# Altium PCB WorldClock.PcbDoc (part 11 of 13)
Units mil, origin at the board's own origin, x right, y up, seen from the top; angles counter-clockwise.
Board outline 3700 x 3850 mil, 2 copper layers (Top Layer, Bottom Layer); 227 components, 134 nets, 1324 pads, 248 vias.
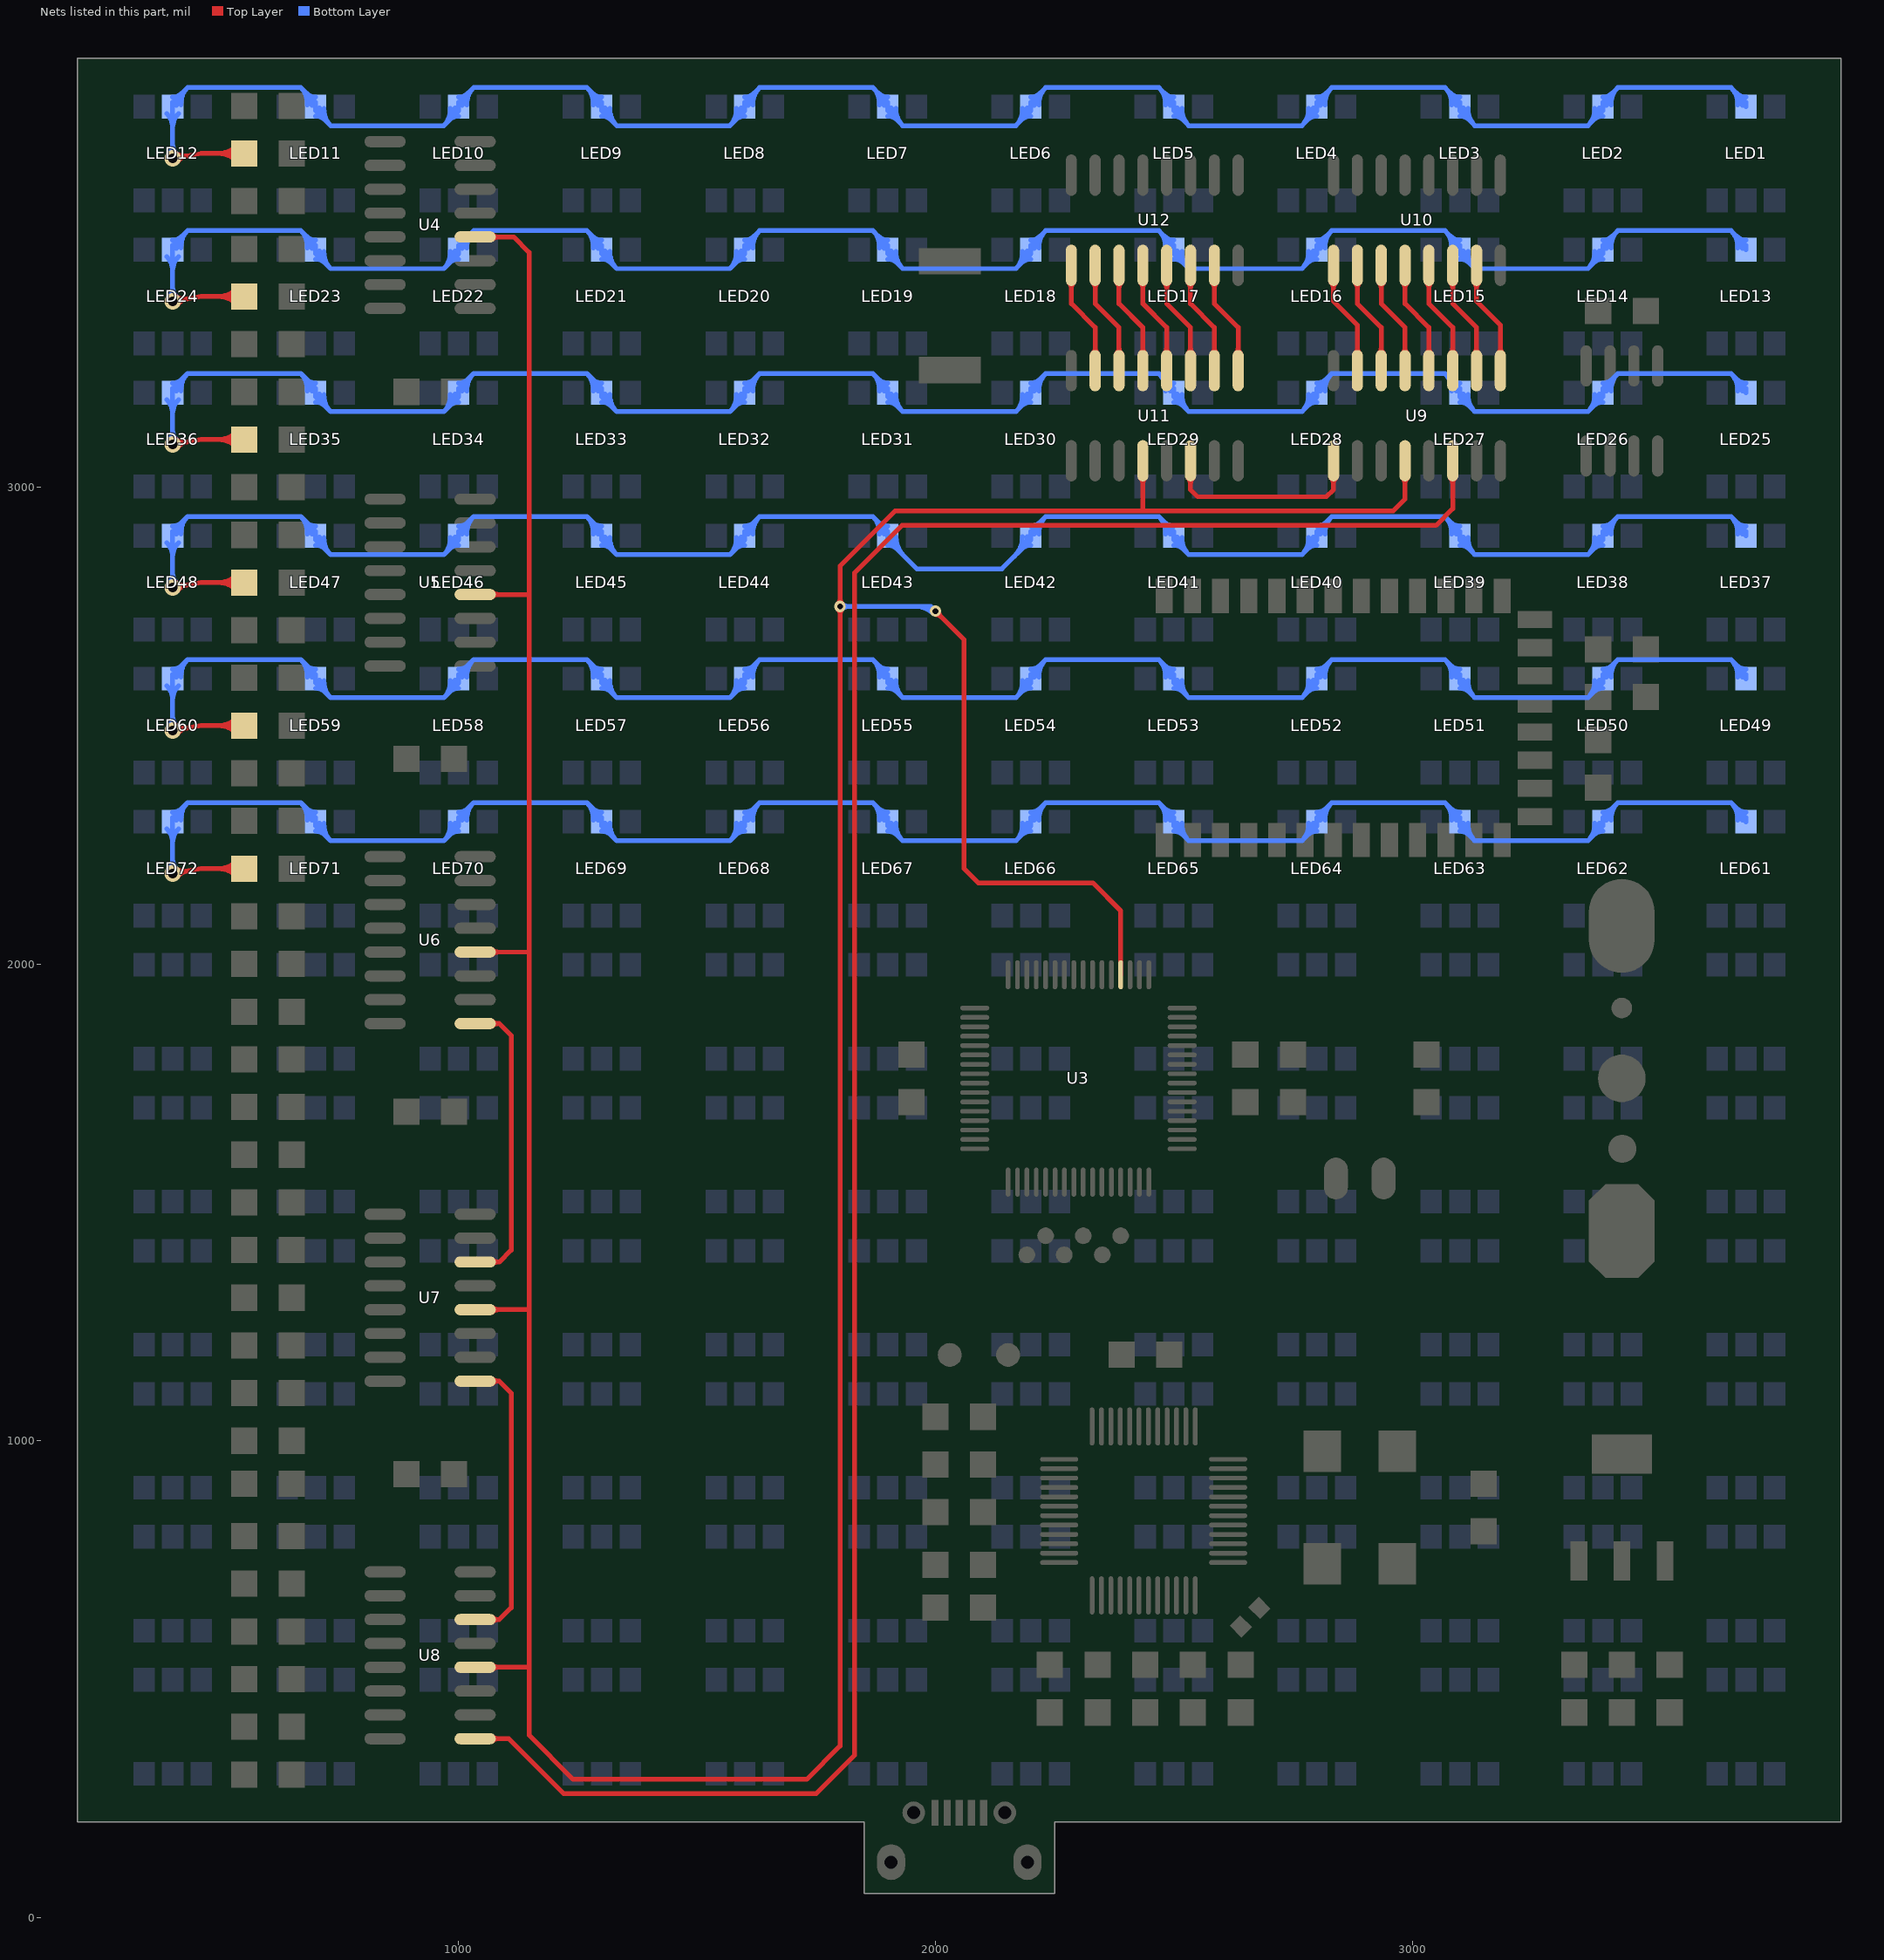
[diagram p11: the nets of this part, all layers, seen from the top]

## Via types
v1: diameter 35, hole 20, Top Layer to Bottom Layer, tented both sides, 213 vias
v2: diameter 24, hole 12, Top Layer to Bottom Layer, tented both sides, 35 vias

## Nets (pads, with @x,y where several pads share a name; then routed paths per layer and width w, separated by ;. In a path a pad name is that pad's centre, name@x,y a point inside that pad or via, vN(x,y) a via of type N, cw(c..) or ccw(c..) an arc to the next point about the centre after c; other vN are vias at no path point) (continued)
NetU6_9: U6.9 U7.14 | length 673.4
  Top Layer w10: U7.14@1034.49,1375 1085,1375 1110,1400 1110,1850 1085,1875 U6.9@1034.49,1875 ; U7.14@1070.8,1370.18 cw(c1082.43,1358.56) 1082.43,1375 cw(c1082.43,1391.44) U7.14@1070.8,1379.82 ; U6.9@1070.8,1870.18 cw(c1082.43,1858.56) 1082.43,1875 cw(c1082.43,1891.44) U6.9@1070.8,1879.82
NetU7_9: U7.9 U8.14 | length 673.4
  Top Layer w10: U8.14@1034.49,625 1085,625 1110,650 1110,1100 1085,1125 U7.9@1034.49,1125 ; U8.14@1070.8,620.18 cw(c1082.43,608.56) 1082.43,625 cw(c1082.43,641.44) U8.14@1070.8,629.82 ; U7.9@1070.8,1120.18 cw(c1082.43,1108.56) 1082.43,1125 cw(c1082.43,1141.44) U7.9@1070.8,1129.82
NetU8_9: U8.9 U9.14 | length 4819.4
  Top Layer w10: U8.9@1034.49,375 1105,375 1220,260 1750,260 1830,340 1830,2820 1930,2920 3050,2920 3085,2955 U9.14@3085,3055.51 ; U8.9@1070.8,370.18 cw(c1082.43,358.56) 1082.43,375 cw(c1082.43,391.44) U8.9@1070.8,379.82 ; U9.14@3080.18,3019.2 cw(c3068.56,3007.57) 3085,3007.57 cw(c3101.44,3007.57) U9.14@3089.82,3019.2
NetU9_1: U9.1 U10.7 | length 283.4
  Top Layer w10: U10.7@3130.18,3429.2 cw(c3118.56,3417.57) 3135,3417.57 cw(c3151.44,3417.57) U10.7@3139.82,3429.2 ; U10.7@3135,3465.51 3135,3390 3185,3340 U9.1@3185,3254.49 ; U9.1@3180.18,3280.8 ccw(c3168.56,3292.43) 3185,3292.43 ccw(c3201.44,3292.43) U9.1@3189.82,3280.8
NetU9_2: U9.2 U10.6 | length 283.4
  Top Layer w10: U10.6@3080.18,3429.2 cw(c3068.56,3417.57) 3085,3417.57 cw(c3101.44,3417.57) U10.6@3089.82,3429.2 ; U10.6@3085,3465.51 3085,3385 3135,3335 U9.2@3135,3254.49 ; U9.2@3130.18,3280.8 ccw(c3118.56,3292.43) 3135,3292.43 ccw(c3151.44,3292.43) U9.2@3139.82,3280.8
NetU9_3: U9.3 U10.5 | length 283.4
  Top Layer w10: U10.5@3030.18,3429.2 cw(c3018.56,3417.57) 3035,3417.57 cw(c3051.44,3417.57) U10.5@3039.82,3429.2 ; U10.5@3035,3465.51 3035,3385 3085,3335 U9.3@3085,3254.49 ; U9.3@3080.18,3280.8 ccw(c3068.56,3292.43) 3085,3292.43 ccw(c3101.44,3292.43) U9.3@3089.82,3280.8
NetU9_4: U9.4 U10.4 | length 283.4
  Top Layer w10: U10.4@2980.18,3429.2 cw(c2968.56,3417.57) 2985,3417.57 cw(c3001.44,3417.57) U10.4@2989.82,3429.2 ; U10.4@2985,3465.51 2985,3385 3035,3335 U9.4@3035,3254.49 ; U9.4@3030.18,3280.8 ccw(c3018.56,3292.43) 3035,3292.43 ccw(c3051.44,3292.43) U9.4@3039.82,3280.8
NetU9_5: U9.5 U10.3 | length 283.4
  Top Layer w10: U10.3@2930.18,3429.2 cw(c2918.56,3417.57) 2935,3417.57 cw(c2951.44,3417.57) U10.3@2939.82,3429.2 ; U10.3@2935,3465.51 2935,3385 2985,3335 U9.5@2985,3254.49 ; U9.5@2980.18,3280.8 ccw(c2968.56,3292.43) 2985,3292.43 ccw(c3001.44,3292.43) U9.5@2989.82,3280.8
NetU9_6: U9.6 U10.2 | length 283.4
  Top Layer w10: U10.2@2880.18,3429.2 cw(c2868.56,3417.57) 2885,3417.57 cw(c2901.44,3417.57) U10.2@2889.82,3429.2 ; U10.2@2885,3465.51 2885,3385 2935,3335 U9.6@2935,3254.49 ; U9.6@2930.18,3280.8 ccw(c2918.56,3292.43) 2935,3292.43 ccw(c2951.44,3292.43) U9.6@2939.82,3280.8
NetU9_7: U9.7 U10.1 | length 283.4
  Top Layer w10: U10.1@2830.18,3429.2 cw(c2818.56,3417.57) 2835,3417.57 cw(c2851.44,3417.57) U10.1@2839.82,3429.2 ; U10.1@2835,3465.51 2835,3390 2885,3340 U9.7@2885,3254.49 ; U9.7@2880.18,3280.8 ccw(c2868.56,3292.43) 2885,3292.43 ccw(c2901.44,3292.43) U9.7@2889.82,3280.8
NetU9_9: U9.9 U11.14 | length 495.1
  Top Layer w10: U11.14@2530.18,3019.2 cw(c2518.56,3007.57) 2535,3007.57 cw(c2551.44,3007.57) U11.14@2539.82,3019.2 ; U11.14@2535,3065.51 2535,2995 2550,2980 2820,2980 2835,2995 U9.9@2835,3055.51 ; U9.9@2830.18,3019.2 cw(c2818.56,3007.57) 2835,3007.57 cw(c2851.44,3007.57) U9.9@2839.82,3019.2
NetU11_1: U11.1 U12.7 | length 283.4
  Top Layer w10: U12.7@2580.18,3429.2 cw(c2568.56,3417.57) 2585,3417.57 cw(c2601.44,3417.57) U12.7@2589.82,3429.2 ; U12.7@2585,3465.51 2585,3385 2635,3335 U11.1@2635,3254.49 ; U11.1@2630.18,3280.8 ccw(c2618.56,3292.43) 2635,3292.43 ccw(c2651.44,3292.43) U11.1@2639.82,3280.8
NetU11_2: U11.2 U12.6 | length 283.4
  Top Layer w10: U12.6@2530.18,3429.2 cw(c2518.56,3417.57) 2535,3417.57 cw(c2551.44,3417.57) U12.6@2539.82,3429.2 ; U12.6@2535,3465.51 2535,3385 2585,3335 U11.2@2585,3254.49 ; U11.2@2580.18,3280.8 ccw(c2568.56,3292.43) 2585,3292.43 ccw(c2601.44,3292.43) U11.2@2589.82,3280.8
NetU11_3: U11.3 U12.5 | length 283.4
  Top Layer w10: U12.5@2480.18,3429.2 cw(c2468.56,3417.57) 2485,3417.57 cw(c2501.44,3417.57) U12.5@2489.82,3429.2 ; U12.5@2485,3465.51 2485,3385 2535,3335 U11.3@2535,3254.49 ; U11.3@2530.18,3280.8 ccw(c2518.56,3292.43) 2535,3292.43 ccw(c2551.44,3292.43) U11.3@2539.82,3280.8
NetU11_4: U11.4 U12.4 | length 283.4
  Top Layer w10: U12.4@2430.18,3429.2 cw(c2418.56,3417.57) 2435,3417.57 cw(c2451.44,3417.57) U12.4@2439.82,3429.2 ; U12.4@2435,3465.51 2435,3385 2485,3335 U11.4@2485,3254.49 ; U11.4@2480.18,3280.8 ccw(c2468.56,3292.43) 2485,3292.43 ccw(c2501.44,3292.43) U11.4@2489.82,3280.8
NetU11_5: U11.5 U12.3 | length 283.4
  Top Layer w10: U12.3@2380.18,3429.2 cw(c2368.56,3417.57) 2385,3417.57 cw(c2401.44,3417.57) U12.3@2389.82,3429.2 ; U12.3@2385,3465.51 2385,3385 2435,3335 U11.5@2435,3254.49 ; U11.5@2430.18,3280.8 ccw(c2418.56,3292.43) 2435,3292.43 ccw(c2451.44,3292.43) U11.5@2439.82,3280.8
NetU11_6: U11.6 U12.2 | length 283.4
  Top Layer w10: U12.2@2330.18,3429.2 cw(c2318.56,3417.57) 2335,3417.57 cw(c2351.44,3417.57) U12.2@2339.82,3429.2 ; U12.2@2335,3465.51 2335,3385 2385,3335 U11.6@2385,3254.49 ; U11.6@2380.18,3280.8 ccw(c2368.56,3292.43) 2385,3292.43 ccw(c2401.44,3292.43) U11.6@2389.82,3280.8
NetU11_7: U11.7 U12.1 | length 283.4
  Top Layer w10: U12.1@2280.18,3429.2 cw(c2268.56,3417.57) 2285,3417.57 cw(c2301.44,3417.57) U12.1@2289.82,3429.2 ; U12.1@2285,3465.51 2285,3385 2335,3335 U11.7@2335,3254.49 ; U11.7@2330.18,3280.8 ccw(c2318.56,3292.43) 2335,3292.43 ccw(c2351.44,3292.43) U11.7@2339.82,3280.8
OCK: U3.20 U4.12 U5.12 U6.12 U7.12 U8.12 U9.12 U11.12 | length 9938.7
  Top Layer w10: U8.12@1034.49,525 1147.5,525 ; U7.12@1034.49,1275 1147.5,1275 ; U6.12@1034.49,2025 1147.5,2025 ; U5.12@1034.49,2775 1147.5,2775 ; U4.12@1034.49,3525 1115,3525 1147.5,3492.5 1147.5,2775 ; U8.12@1070.8,520.18 cw(c1082.43,508.56) 1082.43,525 cw(c1082.43,541.44) U8.12@1070.8,529.82 ; U7.12@1070.8,1270.18 cw(c1082.43,1258.56) 1082.43,1275 cw(c1082.43,1291.44) U7.12@1070.8,1279.82 ; U6.12@1070.8,2020.18 cw(c1082.43,2008.56) 1082.43,2025 cw(c1082.43,2041.44) U6.12@1070.8,2029.82 ; U5.12@1070.8,2770.18 cw(c1082.43,2758.56) 1082.43,2775 cw(c1082.43,2791.44) U5.12@1070.8,2779.82 ; U4.12@1070.8,3520.18 cw(c1082.43,3508.56) 1082.43,3525 cw(c1082.43,3541.44) U4.12@1070.8,3529.82 ; v2@1795.05,2745.05 cw(c1783.1,2733.1) 1800,2733.1 cw(c1816.9,2733.1) v2@1804.95,2745.05 ; v2@1795.05,2754.95 ccw(c1783.1,2766.9) 1800,2766.9 ccw(c1816.9,2766.9) v2@1804.95,2754.95 ; v2@2000,2733 cw(c2000,2716.1) 2011.95,2728.05 cw(c2023.9,2740) v2@2007,2740 ; v2(2000,2740) 2060,2680 2060,2200 2090,2170 2330,2170 2388.58,2111.42 U3.20@2388.58,1977.52 ; U11.12@2430.18,3019.2 cw(c2418.56,3007.57) 2435,3007.57 cw(c2451.44,3007.57) U11.12@2439.82,3019.2 ; 2435,2950 U11.12@2435,3065.51 ; U9.12@2980.18,3019.2 cw(c2968.56,3007.57) 2985,3007.57 cw(c3001.44,3007.57) U9.12@2989.82,3019.2 ; U9.12@2985,3055.51 2985,2975 2960,2950 1915,2950 1800,2835 v2(1800,2750) 1800,360 1730,290 1240,290 1147.5,382.5 1147.5,525 ; 1147.5,525 1147.5,1275 ; 1147.5,1275 1147.5,2025 ; 1147.5,2025 1147.5,2775
  Bottom Layer w10: v2(1800,2750) 1990,2750 v2(2000,2740) ; v2@1804.95,2745.05 cw(c1816.9,2733.1) 1816.9,2750 cw(c1816.9,2766.9) v2@1804.95,2754.95 ; 1958.96,2750 cw(c1958.96,2698.96) v2@1995.05,2735.05 ; 1983.1,2750 cw(c1983.1,2723.1) v2@2002.12,2742.12
R1: LED1.2 LED2.2 LED3.2 LED4.2 LED5.2 LED6.2 LED7.2 LED8.2 LED9.2 LED10.2 LED11.2 LED12.2 R10.1 | length 6201.5
  Top Layer w10: v1(400,3690) 460,3700 R10.1@550,3700 ; v1@407.27,3700.17 ccw(c424.81,3724.73) 429.77,3694.96 ccw(c434.73,3665.19) v1@410.17,3682.73 ; R10.1@534.09,3684.09 ccw(c495.68,3645.68) 495.68,3700 ccw(c495.68,3754.32) R10.1@534.09,3715.91 ; R10.1@541.16,3691.16 ccw(c519.82,3669.82) 519.82,3700 ccw(c519.82,3730.18) R10.1@541.16,3708.84
  Bottom Layer w10: LED12.2@387.63,3783.55 cw(c357.75,3753.68) 400,3753.68 cw(c442.25,3753.68) LED12.2@412.37,3783.55 ; v1@391.16,3698.84 ccw(c369.82,3720.18) 400,3720.18 ccw(c430.18,3720.18) v1@408.84,3698.84 ; v1(400,3690) LED12.2@400,3798.43 400,3807.14 431.29,3838.43 668.71,3838.43 700,3807.14 LED11.2@700,3798.43 700,3789.71 731.29,3758.43 ; LED12.2@400,3818.43 ccw(c400,3845.67) 419.27,3826.41 ; LED12.2@407.49,3801.38 cw(c435.23,3803.06) LED12.2@415.58,3822.71 ; LED12.2@417.47,3801.98 cw(c464.85,3804.86) 431.28,3838.42 ; 668.72,3838.42 cw(c635.15,3804.86) LED11.2@682.53,3801.98 ; 680.73,3826.41 ccw(c700,3845.67) LED11.2@700,3818.43 ; LED11.2@684.42,3822.71 cw(c664.77,3803.06) LED11.2@692.51,3801.38 ; LED11.2@700,3778.43 cw(c700,3751.18) 719.27,3770.44 ; LED11.2@707.49,3795.47 ccw(c735.23,3793.79) LED11.2@715.58,3774.14 ; LED11.2@717.47,3794.87 ccw(c764.85,3791.99) 731.28,3758.43 ; 980.73,3770.44 cw(c1000,3751.18) LED10.2@1000,3778.43 ; LED10.2@982.53,3794.87 cw(c935.15,3791.99) 968.72,3758.43 ; LED10.2@984.42,3774.14 ccw(c964.77,3793.79) LED10.2@992.51,3795.47 ; LED10.2@1000,3818.43 ccw(c1000,3845.67) 1019.27,3826.41 ; LED10.2@1007.49,3801.38 cw(c1035.23,3803.06) LED10.2@1015.58,3822.71 ; LED10.2@1017.47,3801.98 cw(c1064.85,3804.86) 1031.28,3838.42 ; 1268.72,3838.42 cw(c1235.15,3804.86) LED9.2@1282.53,3801.98 ; 1280.73,3826.41 ccw(c1300,3845.67) LED9.2@1300,3818.43 ; LED9.2@1284.42,3822.71 cw(c1264.77,3803.06) LED9.2@1292.51,3801.38 ; LED9.2@1300,3778.43 cw(c1300,3751.18) 1319.27,3770.44 ; LED9.2@1307.49,3795.47 ccw(c1335.23,3793.79) LED9.2@1315.58,3774.14 ; LED9.2@1317.47,3794.87 ccw(c1364.85,3791.99) 1331.28,3758.43 ; 1580.73,3770.44 cw(c1600,3751.18) LED8.2@1600,3778.43 ; LED8.2@1582.53,3794.87 cw(c1535.15,3791.99) 1568.72,3758.43 ; LED8.2@1584.42,3774.14 ccw(c1564.77,3793.79) LED8.2@1592.51,3795.47 ; LED8.2@1600,3818.43 ccw(c1600,3845.67) 1619.27,3826.41 ; LED8.2@1607.49,3801.38 cw(c1635.23,3803.06) LED8.2@1615.58,3822.71 ; LED8.2@1617.47,3801.98 cw(c1664.85,3804.86) 1631.28,3838.42 ; 1868.72,3838.42 cw(c1835.15,3804.86) LED7.2@1882.53,3801.98 ; 1880.73,3826.41 ccw(c1900,3845.67) LED7.2@1900,3818.43 ; LED7.2@1884.42,3822.71 cw(c1864.77,3803.06) LED7.2@1892.51,3801.38 ; LED7.2@1900,3778.43 cw(c1900,3751.18) 1919.27,3770.44 ; LED7.2@1907.49,3795.47 ccw(c1935.23,3793.79) LED7.2@1915.58,3774.14 ; LED7.2@1917.47,3794.87 ccw(c1964.85,3791.99) 1931.28,3758.43 ; 2180.73,3770.44 cw(c2200,3751.18) LED6.2@2200,3778.43 ; LED6.2@2182.53,3794.87 cw(c2135.15,3791.99) 2168.72,3758.43 ; LED6.2@2184.42,3774.14 ccw(c2164.77,3793.79) LED6.2@2192.51,3795.47 ; LED6.2@2200,3818.43 ccw(c2200,3845.67) 2219.27,3826.41 ; LED6.2@2207.49,3801.38 cw(c2235.23,3803.06) LED6.2@2215.58,3822.71 ; LED6.2@2217.47,3801.98 cw(c2264.85,3804.86) 2231.28,3838.42 ; 2468.72,3838.42 cw(c2435.15,3804.86) LED5.2@2482.53,3801.98 ; 2480.73,3826.41 ccw(c2500,3845.67) LED5.2@2500,3818.43 ; LED5.2@2484.42,3822.71 cw(c2464.77,3803.06) LED5.2@2492.51,3801.38 ; LED5.2@2500,3778.43 cw(c2500,3751.18) 2519.27,3770.44 ; LED5.2@2507.49,3795.47 ccw(c2535.23,3793.79) LED5.2@2515.58,3774.14 ; LED5.2@2517.47,3794.87 ccw(c2564.85,3791.99) 2531.28,3758.43 ; 2780.73,3770.44 cw(c2800,3751.18) LED4.2@2800,3778.43 ; LED4.2@2782.53,3794.87 cw(c2735.15,3791.99) 2768.72,3758.43 ; LED4.2@2784.42,3774.14 ccw(c2764.77,3793.79) LED4.2@2792.51,3795.47 ; LED4.2@2800,3818.43 ccw(c2800,3845.67) 2819.27,3826.41 ; LED4.2@2807.49,3801.38 cw(c2835.23,3803.06) LED4.2@2815.58,3822.71 ; LED4.2@2817.47,3801.98 cw(c2864.85,3804.86) 2831.28,3838.42 ; 3068.72,3838.42 cw(c3035.15,3804.86) LED3.2@3082.53,3801.98 ; 3080.73,3826.41 ccw(c3100,3845.67) LED3.2@3100,3818.43 ; LED3.2@3084.42,3822.71 cw(c3064.77,3803.06) LED3.2@3092.51,3801.38 ; LED3.2@3100,3778.43 cw(c3100,3751.18) 3119.27,3770.44 ; LED3.2@3107.49,3795.47 ccw(c3135.23,3793.79) LED3.2@3115.58,3774.14 ; LED3.2@3117.47,3794.87 ccw(c3164.85,3791.99) 3131.28,3758.43 ; 3380.73,3770.44 cw(c3400,3751.18) LED2.2@3400,3778.43 ; LED2.2@3382.53,3794.87 cw(c3335.15,3791.99) 3368.72,3758.43 ; LED2.2@3384.42,3774.14 ccw(c3364.77,3793.79) LED2.2@3392.51,3795.47 ; LED2.2@3400,3818.43 ccw(c3400,3845.67) 3419.27,3826.41 ; LED2.2@3407.49,3801.38 cw(c3435.23,3803.06) LED2.2@3415.58,3822.71 ; LED2.2@3417.47,3801.98 cw(c3464.85,3804.86) 3431.28,3838.42 ; 3668.72,3838.42 cw(c3635.15,3804.86) LED1.2@3682.53,3801.98 ; 3680.73,3826.41 ccw(c3700,3845.67) LED1.2@3700,3818.43 ; LED1.2@3684.42,3822.71 cw(c3664.77,3803.06) LED1.2@3692.51,3801.38 ; LED1.2@3700,3798.43 3700,3807.14 3668.71,3838.43 3431.29,3838.43 3400,3807.14 LED2.2@3400,3798.43 3400,3789.71 3368.71,3758.43 ; 731.29,3758.43 968.71,3758.43 ; 968.71,3758.43 1000,3789.71 LED10.2@1000,3798.43 1000,3807.14 1031.29,3838.43 1268.71,3838.43 1300,3807.14 LED9.2@1300,3798.43 1300,3789.71 1331.29,3758.43 ; 1331.29,3758.43 1568.71,3758.43 ; 1568.71,3758.43 1600,3789.71 LED8.2@1600,3798.43 1600,3807.14 1631.29,3838.43 1868.71,3838.43 1900,3807.14 LED7.2@1900,3798.43 1900,3789.71 1931.29,3758.43 ; 1931.29,3758.43 2168.71,3758.43 ; 2168.71,3758.43 2200,3789.71 LED6.2@2200,3798.43 2200,3807.14 2231.29,3838.43 2468.71,3838.43 2500,3807.14 LED5.2@2500,3798.43 2500,3789.71 2531.29,3758.43 ; 2531.29,3758.43 2768.71,3758.43 ; 2768.71,3758.43 2800,3789.71 LED4.2@2800,3798.43 2800,3807.14 2831.29,3838.43 3068.71,3838.43 3100,3807.14 LED3.2@3100,3798.43 3100,3789.71 3131.29,3758.43 ; 3131.29,3758.43 3368.71,3758.43
R2: LED13.2 LED14.2 LED15.2 LED16.2 LED17.2 LED18.2 LED19.2 LED20.2 LED21.2 LED22.2 LED23.2 LED24.2 R14.1 | length 6204.6
  Top Layer w10: v1@403,3390.5 v1(400,3390) 460,3400 R14.1@550,3400 ; v1@407.27,3400.17 ccw(c424.81,3424.73) 429.77,3394.96 ccw(c434.73,3365.19) v1@410.17,3382.73 ; R14.1@534.09,3384.09 ccw(c495.68,3345.68) 495.68,3400 ccw(c495.68,3454.32) R14.1@534.09,3415.91 ; R14.1@541.16,3391.16 ccw(c519.82,3369.82) 519.82,3400 ccw(c519.82,3430.18) R14.1@541.16,3408.84
  Bottom Layer w10: LED24.2@387.63,3483.55 cw(c357.75,3453.68) 400,3453.68 cw(c442.25,3453.68) LED24.2@412.37,3483.55 ; v1@391.16,3398.84 ccw(c369.82,3420.18) 400,3420.18 ccw(c430.18,3420.18) v1@408.84,3398.84 ; v1(400,3390) LED24.2@400,3498.43 400,3507.14 431.29,3538.43 668.71,3538.43 700,3507.14 LED23.2@700,3498.43 700,3489.71 731.29,3458.43 ; LED24.2@400,3518.43 ccw(c400,3545.67) 419.27,3526.41 ; LED24.2@407.49,3501.38 cw(c435.23,3503.06) LED24.2@415.58,3522.71 ; LED24.2@417.47,3501.98 cw(c464.85,3504.86) 431.28,3538.42 ; 668.72,3538.42 cw(c635.15,3504.86) LED23.2@682.53,3501.98 ; 680.73,3526.41 ccw(c700,3545.67) LED23.2@700,3518.43 ; LED23.2@684.42,3522.71 cw(c664.77,3503.06) LED23.2@692.51,3501.38 ; LED23.2@700,3478.43 cw(c700,3451.18) 719.27,3470.44 ; LED23.2@707.49,3495.47 ccw(c735.23,3493.79) LED23.2@715.58,3474.14 ; LED23.2@717.47,3494.87 ccw(c764.85,3491.99) 731.28,3458.43 ; 980.73,3470.44 cw(c1000,3451.18) LED22.2@1000,3478.43 ; LED22.2@982.53,3494.87 cw(c935.15,3491.99) 968.72,3458.43 ; LED22.2@984.42,3474.14 ccw(c964.77,3493.79) LED22.2@992.51,3495.47 ; LED22.2@1000,3518.43 ccw(c1000,3545.67) 1019.27,3526.41 ; LED22.2@1007.49,3501.38 cw(c1035.23,3503.06) LED22.2@1015.58,3522.71 ; LED22.2@1017.47,3501.98 cw(c1064.85,3504.86) 1031.28,3538.42 ; 1268.72,3538.42 cw(c1235.15,3504.86) LED21.2@1282.53,3501.98 ; 1280.73,3526.41 ccw(c1300,3545.67) LED21.2@1300,3518.43 ; LED21.2@1284.42,3522.71 cw(c1264.77,3503.06) LED21.2@1292.51,3501.38 ; LED21.2@1300,3478.43 cw(c1300,3451.18) 1319.27,3470.44 ; LED21.2@1307.49,3495.47 ccw(c1335.23,3493.79) LED21.2@1315.58,3474.14 ; LED21.2@1317.47,3494.87 ccw(c1364.85,3491.99) 1331.28,3458.43 ; 1580.73,3470.44 cw(c1600,3451.18) LED20.2@1600,3478.43 ; LED20.2@1582.53,3494.87 cw(c1535.15,3491.99) 1568.72,3458.43 ; LED20.2@1584.42,3474.14 ccw(c1564.77,3493.79) LED20.2@1592.51,3495.47 ; LED20.2@1600,3518.43 ccw(c1600,3545.67) 1619.27,3526.41 ; LED20.2@1607.49,3501.38 cw(c1635.23,3503.06) LED20.2@1615.58,3522.71 ; LED20.2@1617.47,3501.98 cw(c1664.85,3504.86) 1631.28,3538.42 ; 1868.72,3538.42 cw(c1835.15,3504.86) LED19.2@1882.53,3501.98 ; 1880.73,3526.41 ccw(c1900,3545.67) LED19.2@1900,3518.43 ; LED19.2@1884.42,3522.71 cw(c1864.77,3503.06) LED19.2@1892.51,3501.38 ; LED19.2@1900,3478.43 cw(c1900,3451.18) 1919.27,3470.44 ; LED19.2@1907.49,3495.47 ccw(c1935.23,3493.79) LED19.2@1915.58,3474.14 ; LED19.2@1917.47,3494.87 ccw(c1964.85,3491.99) 1931.28,3458.43 ; 2180.73,3470.44 cw(c2200,3451.18) LED18.2@2200,3478.43 ; LED18.2@2182.53,3494.87 cw(c2135.15,3491.99) 2168.72,3458.43 ; LED18.2@2184.42,3474.14 ccw(c2164.77,3493.79) LED18.2@2192.51,3495.47 ; LED18.2@2200,3518.43 ccw(c2200,3545.67) 2219.27,3526.41 ; LED18.2@2207.49,3501.38 cw(c2235.23,3503.06) LED18.2@2215.58,3522.71 ; LED18.2@2217.47,3501.98 cw(c2264.85,3504.86) 2231.28,3538.42 ; 2468.72,3538.42 cw(c2435.15,3504.86) LED17.2@2482.53,3501.98 ; 2480.73,3526.41 ccw(c2500,3545.67) LED17.2@2500,3518.43 ; LED17.2@2484.42,3522.71 cw(c2464.77,3503.06) LED17.2@2492.51,3501.38 ; LED17.2@2500,3478.43 cw(c2500,3451.18) 2519.27,3470.44 ; LED17.2@2507.49,3495.47 ccw(c2535.23,3493.79) LED17.2@2515.58,3474.14 ; LED17.2@2517.47,3494.87 ccw(c2564.85,3491.99) 2531.28,3458.43 ; 2780.73,3470.44 cw(c2800,3451.18) LED16.2@2800,3478.43 ; LED16.2@2782.53,3494.87 cw(c2735.15,3491.99) 2768.72,3458.43 ; LED16.2@2784.42,3474.14 ccw(c2764.77,3493.79) LED16.2@2792.51,3495.47 ; LED16.2@2800,3518.43 ccw(c2800,3545.67) 2819.27,3526.41 ; LED16.2@2807.49,3501.38 cw(c2835.23,3503.06) LED16.2@2815.58,3522.71 ; LED16.2@2817.47,3501.98 cw(c2864.85,3504.86) 2831.28,3538.42 ; 3068.72,3538.42 cw(c3035.15,3504.86) LED15.2@3082.53,3501.98 ; 3080.73,3526.41 ccw(c3100,3545.67) LED15.2@3100,3518.43 ; LED15.2@3084.42,3522.71 cw(c3064.77,3503.06) LED15.2@3092.51,3501.38 ; LED15.2@3100,3478.43 cw(c3100,3451.18) 3119.27,3470.44 ; LED15.2@3107.49,3495.47 ccw(c3135.23,3493.79) LED15.2@3115.58,3474.14 ; LED15.2@3117.47,3494.87 ccw(c3164.85,3491.99) 3131.28,3458.43 ; 3380.73,3470.44 cw(c3400,3451.18) LED14.2@3400,3478.43 ; LED14.2@3382.53,3494.87 cw(c3335.15,3491.99) 3368.72,3458.43 ; LED14.2@3384.42,3474.14 ccw(c3364.77,3493.79) LED14.2@3392.51,3495.47 ; LED14.2@3400,3518.43 ccw(c3400,3545.67) 3419.27,3526.41 ; LED14.2@3407.49,3501.38 cw(c3435.23,3503.06) LED14.2@3415.58,3522.71 ; LED14.2@3417.47,3501.98 cw(c3464.85,3504.86) 3431.28,3538.42 ; 3668.72,3538.42 cw(c3635.15,3504.86) LED13.2@3682.53,3501.98 ; 3680.73,3526.41 ccw(c3700,3545.67) LED13.2@3700,3518.43 ; LED13.2@3684.42,3522.71 cw(c3664.77,3503.06) LED13.2@3692.51,3501.38 ; LED13.2@3700,3498.43 3700,3507.14 3668.71,3538.43 3431.29,3538.43 3400,3507.14 LED14.2@3400,3498.43 3400,3489.71 3368.71,3458.43 ; 731.29,3458.43 968.71,3458.43 ; 968.71,3458.43 1000,3489.71 LED22.2@1000,3498.43 1000,3507.14 1031.29,3538.43 1268.71,3538.43 1300,3507.14 LED21.2@1300,3498.43 1300,3489.71 1331.29,3458.43 ; 1331.29,3458.43 1568.71,3458.43 ; 1568.71,3458.43 1600,3489.71 LED20.2@1600,3498.43 1600,3507.14 1631.29,3538.43 1868.71,3538.43 1900,3507.14 LED19.2@1900,3498.43 1900,3489.71 1931.29,3458.43 ; 1931.29,3458.43 2168.71,3458.43 ; 2168.71,3458.43 2200,3489.71 LED18.2@2200,3498.43 2200,3507.14 2231.29,3538.43 2468.71,3538.43 2500,3507.14 LED17.2@2500,3498.43 2500,3489.71 2531.29,3458.43 ; 2531.29,3458.43 2768.71,3458.43 ; 2768.71,3458.43 2800,3489.71 LED16.2@2800,3498.43 2800,3507.14 2831.29,3538.43 3068.71,3538.43 3100,3507.14 LED15.2@3100,3498.43 3100,3489.71 3131.29,3458.43 ; 3131.29,3458.43 3368.71,3458.43
R3: LED25.2 LED26.2 LED27.2 LED28.2 LED29.2 LED30.2 LED31.2 LED32.2 LED33.2 LED34.2 LED35.2 LED36.2 R17.1 | length 6201.5
  Top Layer w10: v1(400,3090) 460,3100 R17.1@550,3100 ; v1@407.27,3100.17 ccw(c424.81,3124.73) 429.77,3094.96 ccw(c434.73,3065.19) v1@410.17,3082.73 ; R17.1@534.09,3084.09 ccw(c495.68,3045.68) 495.68,3100 ccw(c495.68,3154.32) R17.1@534.09,3115.91 ; R17.1@541.16,3091.16 ccw(c519.82,3069.82) 519.82,3100 ccw(c519.82,3130.18) R17.1@541.16,3108.84
  Bottom Layer w10: LED36.2@387.63,3183.55 cw(c357.75,3153.68) 400,3153.68 cw(c442.25,3153.68) LED36.2@412.37,3183.55 ; v1@391.16,3098.84 ccw(c369.82,3120.18) 400,3120.18 ccw(c430.18,3120.18) v1@408.84,3098.84 ; v1(400,3090) LED36.2@400,3198.43 400,3207.14 431.29,3238.43 668.71,3238.43 700,3207.14 LED35.2@700,3198.43 700,3189.71 731.29,3158.43 ; LED36.2@400,3218.43 ccw(c400,3245.67) 419.27,3226.41 ; LED36.2@407.49,3201.38 cw(c435.23,3203.06) LED36.2@415.58,3222.71 ; LED36.2@417.47,3201.98 cw(c464.85,3204.86) 431.28,3238.42 ; 668.72,3238.42 cw(c635.15,3204.86) LED35.2@682.53,3201.98 ; 680.73,3226.41 ccw(c700,3245.67) LED35.2@700,3218.43 ; LED35.2@684.42,3222.71 cw(c664.77,3203.06) LED35.2@692.51,3201.38 ; LED35.2@700,3178.43 cw(c700,3151.18) 719.27,3170.44 ; LED35.2@707.49,3195.47 ccw(c735.23,3193.79) LED35.2@715.58,3174.14 ; LED35.2@717.47,3194.87 ccw(c764.85,3191.99) 731.28,3158.43 ; 980.73,3170.44 cw(c1000,3151.18) LED34.2@1000,3178.43 ; LED34.2@982.53,3194.87 cw(c935.15,3191.99) 968.72,3158.43 ; LED34.2@984.42,3174.14 ccw(c964.77,3193.79) LED34.2@992.51,3195.47 ; LED34.2@1000,3218.43 ccw(c1000,3245.67) 1019.27,3226.41 ; LED34.2@1007.49,3201.38 cw(c1035.23,3203.06) LED34.2@1015.58,3222.71 ; LED34.2@1017.47,3201.98 cw(c1064.85,3204.86) 1031.28,3238.42 ; 1268.72,3238.42 cw(c1235.15,3204.86) LED33.2@1282.53,3201.98 ; 1280.73,3226.41 ccw(c1300,3245.67) LED33.2@1300,3218.43 ; LED33.2@1284.42,3222.71 cw(c1264.77,3203.06) LED33.2@1292.51,3201.38 ; LED33.2@1300,3178.43 cw(c1300,3151.18) 1319.27,3170.44 ; LED33.2@1307.49,3195.47 ccw(c1335.23,3193.79) LED33.2@1315.58,3174.14 ; LED33.2@1317.47,3194.87 ccw(c1364.85,3191.99) 1331.28,3158.43 ; 1580.73,3170.44 cw(c1600,3151.18) LED32.2@1600,3178.43 ; LED32.2@1582.53,3194.87 cw(c1535.15,3191.99) 1568.72,3158.43 ; LED32.2@1584.42,3174.14 ccw(c1564.77,3193.79) LED32.2@1592.51,3195.47 ; LED32.2@1600,3218.43 ccw(c1600,3245.67) 1619.27,3226.41 ; LED32.2@1607.49,3201.38 cw(c1635.23,3203.06) LED32.2@1615.58,3222.71 ; LED32.2@1617.47,3201.98 cw(c1664.85,3204.86) 1631.28,3238.42 ; 1868.72,3238.42 cw(c1835.15,3204.86) LED31.2@1882.53,3201.98 ; 1880.73,3226.41 ccw(c1900,3245.67) LED31.2@1900,3218.43 ; LED31.2@1884.42,3222.71 cw(c1864.77,3203.06) LED31.2@1892.51,3201.38 ; LED31.2@1900,3178.43 cw(c1900,3151.18) 1919.27,3170.44 ; LED31.2@1907.49,3195.47 ccw(c1935.23,3193.79) LED31.2@1915.58,3174.14 ; LED31.2@1917.47,3194.87 ccw(c1964.85,3191.99) 1931.28,3158.43 ; 2180.73,3170.44 cw(c2200,3151.18) LED30.2@2200,3178.43 ; LED30.2@2182.53,3194.87 cw(c2135.15,3191.99) 2168.72,3158.43 ; LED30.2@2184.42,3174.14 ccw(c2164.77,3193.79) LED30.2@2192.51,3195.47 ; LED30.2@2200,3218.43 ccw(c2200,3245.67) 2219.27,3226.41 ; LED30.2@2207.49,3201.38 cw(c2235.23,3203.06) LED30.2@2215.58,3222.71 ; LED30.2@2217.47,3201.98 cw(c2264.85,3204.86) 2231.28,3238.42 ; 2468.72,3238.42 cw(c2435.15,3204.86) LED29.2@2482.53,3201.98 ; 2480.73,3226.41 ccw(c2500,3245.67) LED29.2@2500,3218.43 ; LED29.2@2484.42,3222.71 cw(c2464.77,3203.06) LED29.2@2492.51,3201.38 ; LED29.2@2500,3178.43 cw(c2500,3151.18) 2519.27,3170.44 ; LED29.2@2507.49,3195.47 ccw(c2535.23,3193.79) LED29.2@2515.58,3174.14 ; LED29.2@2517.47,3194.87 ccw(c2564.85,3191.99) 2531.28,3158.43 ; 2780.73,3170.44 cw(c2800,3151.18) LED28.2@2800,3178.43 ; LED28.2@2782.53,3194.87 cw(c2735.15,3191.99) 2768.72,3158.43 ; LED28.2@2784.42,3174.14 ccw(c2764.77,3193.79) LED28.2@2792.51,3195.47 ; LED28.2@2800,3218.43 ccw(c2800,3245.67) 2819.27,3226.41 ; LED28.2@2807.49,3201.38 cw(c2835.23,3203.06) LED28.2@2815.58,3222.71 ; LED28.2@2817.47,3201.98 cw(c2864.85,3204.86) 2831.28,3238.42 ; 3068.72,3238.42 cw(c3035.15,3204.86) LED27.2@3082.53,3201.98 ; 3080.73,3226.41 ccw(c3100,3245.67) LED27.2@3100,3218.43 ; LED27.2@3084.42,3222.71 cw(c3064.77,3203.06) LED27.2@3092.51,3201.38 ; LED27.2@3100,3178.43 cw(c3100,3151.18) 3119.27,3170.44 ; LED27.2@3107.49,3195.47 ccw(c3135.23,3193.79) LED27.2@3115.58,3174.14 ; LED27.2@3117.47,3194.87 ccw(c3164.85,3191.99) 3131.28,3158.43 ; 3380.73,3170.44 cw(c3400,3151.18) LED26.2@3400,3178.43 ; LED26.2@3382.53,3194.87 cw(c3335.15,3191.99) 3368.72,3158.43 ; LED26.2@3384.42,3174.14 ccw(c3364.77,3193.79) LED26.2@3392.51,3195.47 ; LED26.2@3400,3218.43 ccw(c3400,3245.67) 3419.27,3226.41 ; LED26.2@3407.49,3201.38 cw(c3435.23,3203.06) LED26.2@3415.58,3222.71 ; LED26.2@3417.47,3201.98 cw(c3464.85,3204.86) 3431.28,3238.42 ; 3668.72,3238.42 cw(c3635.15,3204.86) LED25.2@3682.53,3201.98 ; 3680.73,3226.41 ccw(c3700,3245.67) LED25.2@3700,3218.43 ; LED25.2@3684.42,3222.71 cw(c3664.77,3203.06) LED25.2@3692.51,3201.38 ; LED25.2@3700,3198.43 3700,3207.14 3668.71,3238.43 3431.29,3238.43 3400,3207.14 LED26.2@3400,3198.43 3400,3189.71 3368.71,3158.43 ; 731.29,3158.43 968.71,3158.43 ; 968.71,3158.43 1000,3189.71 LED34.2@1000,3198.43 1000,3207.14 1031.29,3238.43 1268.71,3238.43 1300,3207.14 LED33.2@1300,3198.43 1300,3189.71 1331.29,3158.43 ; 1331.29,3158.43 1568.71,3158.43 ; 1568.71,3158.43 1600,3189.71 LED32.2@1600,3198.43 1600,3207.14 1631.29,3238.43 1868.71,3238.43 1900,3207.14 LED31.2@1900,3198.43 1900,3189.71 1931.29,3158.43 ; 1931.29,3158.43 2168.71,3158.43 ; 2168.71,3158.43 2200,3189.71 LED30.2@2200,3198.43 2200,3207.14 2231.29,3238.43 2468.71,3238.43 2500,3207.14 LED29.2@2500,3198.43 2500,3189.71 2531.29,3158.43 ; 2531.29,3158.43 2768.71,3158.43 ; 2768.71,3158.43 2800,3189.71 LED28.2@2800,3198.43 2800,3207.14 2831.29,3238.43 3068.71,3238.43 3100,3207.14 LED27.2@3100,3198.43 3100,3189.71 3131.29,3158.43 ; 3131.29,3158.43 3368.71,3158.43
R4: LED37.2 LED38.2 LED39.2 LED40.2 LED41.2 LED42.2 LED43.2 LED44.2 LED45.2 LED46.2 LED47.2 LED48.2 R19.1 | length 6243.5
  Top Layer w10: v1@403,2790.5 v1(400,2790) 460,2800 R19.1@550,2800 ; v1@407.27,2800.17 ccw(c424.81,2824.73) 429.77,2794.96 ccw(c434.73,2765.19) v1@410.17,2782.73 ; R19.1@534.09,2784.09 ccw(c495.68,2745.68) 495.68,2800 ccw(c495.68,2854.32) R19.1@534.09,2815.91 ; R19.1@541.16,2791.16 ccw(c519.82,2769.82) 519.82,2800 ccw(c519.82,2830.18) R19.1@541.16,2808.84
  Bottom Layer w10: LED48.2@387.63,2883.55 cw(c357.75,2853.68) 400,2853.68 cw(c442.25,2853.68) LED48.2@412.37,2883.55 ; v1@391.16,2798.84 ccw(c369.82,2820.18) 400,2820.18 ccw(c430.18,2820.18) v1@408.84,2798.84 ; v1(400,2790) LED48.2@400,2898.43 400,2907.14 431.29,2938.43 668.71,2938.43 700,2907.14 LED47.2@700,2898.43 700,2889.71 731.29,2858.43 ; LED48.2@400,2918.43 ccw(c400,2945.67) 419.27,2926.41 ; LED48.2@407.49,2901.38 cw(c435.23,2903.06) LED48.2@415.58,2922.71 ; LED48.2@417.47,2901.98 cw(c464.85,2904.86) 431.28,2938.42 ; 668.72,2938.42 cw(c635.15,2904.86) LED47.2@682.53,2901.98 ; 680.73,2926.41 ccw(c700,2945.67) LED47.2@700,2918.43 ; LED47.2@684.42,2922.71 cw(c664.77,2903.06) LED47.2@692.51,2901.38 ; LED47.2@700,2878.43 cw(c700,2851.18) 719.27,2870.44 ; LED47.2@707.49,2895.47 ccw(c735.23,2893.79) LED47.2@715.58,2874.14 ; LED47.2@717.47,2894.87 ccw(c764.85,2891.99) 731.28,2858.43 ; 980.73,2870.44 cw(c1000,2851.18) LED46.2@1000,2878.43 ; LED46.2@982.53,2894.87 cw(c935.15,2891.99) 968.72,2858.43 ; LED46.2@984.42,2874.14 ccw(c964.77,2893.79) LED46.2@992.51,2895.47 ; LED46.2@1000,2918.43 ccw(c1000,2945.67) 1019.27,2926.41 ; LED46.2@1007.49,2901.38 cw(c1035.23,2903.06) LED46.2@1015.58,2922.71 ; LED46.2@1017.47,2901.98 cw(c1064.85,2904.86) 1031.28,2938.42 ; 1268.72,2938.42 cw(c1235.15,2904.86) LED45.2@1282.53,2901.98 ; 1280.73,2926.41 ccw(c1300,2945.67) LED45.2@1300,2918.43 ; LED45.2@1284.42,2922.71 cw(c1264.77,2903.06) LED45.2@1292.51,2901.38 ; LED45.2@1300,2878.43 cw(c1300,2851.18) 1319.27,2870.44 ; LED45.2@1307.49,2895.47 ccw(c1335.23,2893.79) LED45.2@1315.58,2874.14 ; LED45.2@1317.47,2894.87 ccw(c1364.85,2891.99) 1331.28,2858.43 ; 1580.73,2870.44 cw(c1600,2851.18) LED44.2@1600,2878.43 ; LED44.2@1582.53,2894.87 cw(c1535.15,2891.99) 1568.72,2858.43 ; LED44.2@1584.42,2874.14 ccw(c1564.77,2893.79) LED44.2@1592.51,2895.47 ; LED44.2@1600,2918.43 ccw(c1600,2945.67) 1619.27,2926.41 ; LED44.2@1607.49,2901.38 cw(c1635.23,2903.06) LED44.2@1615.58,2922.71 ; LED44.2@1617.47,2901.98 cw(c1664.85,2904.86) 1631.28,2938.42 ; 1868.72,2938.42 cw(c1835.15,2904.86) LED43.2@1882.53,2901.98 ; 1880.73,2926.41 ccw(c1900,2945.67) LED43.2@1900,2918.43 ; LED43.2@1884.42,2922.71 cw(c1864.77,2903.06) LED43.2@1892.51,2901.38 ; LED43.2@1900,2878.43 cw(c1900,2851.18) 1919.27,2870.44 ; LED43.2@1907.5,2895.93 ccw(c1940.61,2895.93) 1917.2,2872.52 ; LED43.2@1917.5,2895.93 ccw(c1974.75,2895.93) 1934.27,2855.44 ; 2165.73,2855.44 ccw(c2125.25,2895.93) LED42.2@2182.5,2895.93 ; 2180.73,2870.44 cw(c2200,2851.18) LED42.2@2200,2878.43 ; 2182.8,2872.52 ccw(c2159.39,2895.93) LED42.2@2192.5,2895.93 ; LED42.2@2200,2918.43 ccw(c2200,2945.67) 2219.27,2926.41 ; LED42.2@2207.49,2901.38 cw(c2235.23,2903.06) LED42.2@2215.58,2922.71 ; LED42.2@2217.47,2901.98 cw(c2264.85,2904.86) 2231.28,2938.42 ; 2468.72,2938.42 cw(c2435.15,2904.86) LED41.2@2482.53,2901.98 ; 2480.73,2926.41 ccw(c2500,2945.67) LED41.2@2500,2918.43 ; LED41.2@2484.42,2922.71 cw(c2464.77,2903.06) LED41.2@2492.51,2901.38 ; LED41.2@2500,2878.43 cw(c2500,2851.18) 2519.27,2870.44 ; LED41.2@2507.49,2895.47 ccw(c2535.23,2893.79) LED41.2@2515.58,2874.14 ; LED41.2@2517.47,2894.87 ccw(c2564.85,2891.99) 2531.28,2858.43 ; 2780.73,2870.44 cw(c2800,2851.18) LED40.2@2800,2878.43 ; LED40.2@2782.53,2894.87 cw(c2735.15,2891.99) 2768.72,2858.43 ; LED40.2@2784.42,2874.14 ccw(c2764.77,2893.79) LED40.2@2792.51,2895.47 ; LED40.2@2800,2918.43 ccw(c2800,2945.67) 2819.27,2926.41 ; LED40.2@2807.49,2901.38 cw(c2835.23,2903.06) LED40.2@2815.58,2922.71 ; LED40.2@2817.47,2901.98 cw(c2864.85,2904.86) 2831.28,2938.42 ; 3068.72,2938.42 cw(c3035.15,2904.86) LED39.2@3082.53,2901.98 ; 3080.73,2926.41 ccw(c3100,2945.67) LED39.2@3100,2918.43 ; LED39.2@3084.42,2922.71 cw(c3064.77,2903.06) LED39.2@3092.51,2901.38 ; LED39.2@3100,2878.43 cw(c3100,2851.18) 3119.27,2870.44 ; LED39.2@3107.49,2895.47 ccw(c3135.23,2893.79) LED39.2@3115.58,2874.14 ; LED39.2@3117.47,2894.87 ccw(c3164.85,2891.99) 3131.28,2858.43 ; 3380.73,2870.44 cw(c3400,2851.18) LED38.2@3400,2878.43 ; LED38.2@3382.53,2894.87 cw(c3335.15,2891.99) 3368.72,2858.43 ; LED38.2@3384.42,2874.14 ccw(c3364.77,2893.79) LED38.2@3392.51,2895.47 ; LED38.2@3400,2918.43 ccw(c3400,2945.67) 3419.27,2926.41 ; LED38.2@3407.49,2901.38 cw(c3435.23,2903.06) LED38.2@3415.58,2922.71 ; LED38.2@3417.47,2901.98 cw(c3464.85,2904.86) 3431.28,2938.42 ; 3668.72,2938.42 cw(c3635.15,2904.86) LED37.2@3682.53,2901.98 ; 3680.73,2926.41 ccw(c3700,2945.67) LED37.2@3700,2918.43 ; LED37.2@3684.42,2922.71 cw(c3664.77,2903.06) LED37.2@3692.51,2901.38 ; LED37.2@3700,2898.43 3700,2907.14 3668.71,2938.43 3431.29,2938.43 3400,2907.14 LED38.2@3400,2898.43 3400,2889.71 3368.71,2858.43 ; 731.29,2858.43 968.71,2858.43 ; 968.71,2858.43 1000,2889.71 LED46.2@1000,2898.43 1000,2907.14 1031.29,2938.43 1268.71,2938.43 1300,2907.14 LED45.2@1300,2898.43 1300,2889.71 1331.29,2858.43 ; 1331.29,2858.43 1568.71,2858.43 ; 1568.71,2858.43 1600,2889.71 LED44.2@1600,2898.43 1600,2907.14 1631.29,2938.43 1868.71,2938.43 1900,2907.14 LED43.2@1900,2898.43 1900,2889.71 1960.71,2829 2139.29,2829 2200,2889.71 LED42.2@2200,2898.43 2200,2907.14 2231.29,2938.43 2468.71,2938.43 2500,2907.14 LED41.2@2500,2898.43 2500,2889.71 2531.29,2858.43 ; 2531.29,2858.43 2768.71,2858.43 ; 2768.71,2858.43 2800,2889.71 LED40.2@2800,2898.43 2800,2907.14 2831.29,2938.43 3068.71,2938.43 3100,2907.14 LED39.2@3100,2898.43 3100,2889.71 3131.29,2858.43 ; 3131.29,2858.43 3368.71,2858.43
R5: LED49.2 LED50.2 LED51.2 LED52.2 LED53.2 LED54.2 LED55.2 LED56.2 LED57.2 LED58.2 LED59.2 LED60.2 R23.1 | length 6201.5
  Top Layer w10: v1(400,2490) 460,2500 R23.1@550,2500 ; v1@407.27,2500.17 ccw(c424.81,2524.73) 429.77,2494.96 ccw(c434.73,2465.19) v1@410.17,2482.73 ; R23.1@534.09,2484.09 ccw(c495.68,2445.68) 495.68,2500 ccw(c495.68,2554.32) R23.1@534.09,2515.91 ; R23.1@541.16,2491.16 ccw(c519.82,2469.82) 519.82,2500 ccw(c519.82,2530.18) R23.1@541.16,2508.84
  Bottom Layer w10: LED60.2@387.63,2583.55 cw(c357.75,2553.68) 400,2553.68 cw(c442.25,2553.68) LED60.2@412.37,2583.55 ; v1@391.16,2498.84 ccw(c369.82,2520.18) 400,2520.18 ccw(c430.18,2520.18) v1@408.84,2498.84 ; v1(400,2490) LED60.2@400,2598.43 400,2607.14 431.29,2638.43 668.71,2638.43 700,2607.14 LED59.2@700,2598.43 700,2589.71 731.29,2558.43 ; LED60.2@400,2618.43 ccw(c400,2645.67) 419.27,2626.41 ; LED60.2@407.49,2601.38 cw(c435.23,2603.06) LED60.2@415.58,2622.71 ; LED60.2@417.47,2601.98 cw(c464.85,2604.86) 431.28,2638.42 ; 668.72,2638.42 cw(c635.15,2604.86) LED59.2@682.53,2601.98 ; 680.73,2626.41 ccw(c700,2645.67) LED59.2@700,2618.43 ; LED59.2@684.42,2622.71 cw(c664.77,2603.06) LED59.2@692.51,2601.38 ; LED59.2@700,2578.43 cw(c700,2551.18) 719.27,2570.44 ; LED59.2@707.49,2595.47 ccw(c735.23,2593.79) LED59.2@715.58,2574.14 ; LED59.2@717.47,2594.87 ccw(c764.85,2591.99) 731.28,2558.43 ; 980.73,2570.44 cw(c1000,2551.18) LED58.2@1000,2578.43 ; LED58.2@982.53,2594.87 cw(c935.15,2591.99) 968.72,2558.43 ; LED58.2@984.42,2574.14 ccw(c964.77,2593.79) LED58.2@992.51,2595.47 ; LED58.2@1000,2618.43 ccw(c1000,2645.67) 1019.27,2626.41 ; LED58.2@1007.49,2601.38 cw(c1035.23,2603.06) LED58.2@1015.58,2622.71 ; LED58.2@1017.47,2601.98 cw(c1064.85,2604.86) 1031.28,2638.42 ; 1268.72,2638.42 cw(c1235.15,2604.86) LED57.2@1282.53,2601.98 ; 1280.73,2626.41 ccw(c1300,2645.67) LED57.2@1300,2618.43 ; LED57.2@1284.42,2622.71 cw(c1264.77,2603.06) LED57.2@1292.51,2601.38 ; LED57.2@1300,2578.43 cw(c1300,2551.18) 1319.27,2570.44 ; LED57.2@1307.49,2595.47 ccw(c1335.23,2593.79) LED57.2@1315.58,2574.14 ; LED57.2@1317.47,2594.87 ccw(c1364.85,2591.99) 1331.28,2558.43 ; 1580.73,2570.44 cw(c1600,2551.18) LED56.2@1600,2578.43 ; LED56.2@1582.53,2594.87 cw(c1535.15,2591.99) 1568.72,2558.43 ; LED56.2@1584.42,2574.14 ccw(c1564.77,2593.79) LED56.2@1592.51,2595.47 ; LED56.2@1600,2618.43 ccw(c1600,2645.67) 1619.27,2626.41 ; LED56.2@1607.49,2601.38 cw(c1635.23,2603.06) LED56.2@1615.58,2622.71 ; LED56.2@1617.47,2601.98 cw(c1664.85,2604.86) 1631.28,2638.42 ; 1868.72,2638.42 cw(c1835.15,2604.86) LED55.2@1882.53,2601.98 ; 1880.73,2626.41 ccw(c1900,2645.67) LED55.2@1900,2618.43 ; LED55.2@1884.42,2622.71 cw(c1864.77,2603.06) LED55.2@1892.51,2601.38 ; LED55.2@1900,2578.43 cw(c1900,2551.18) 1919.27,2570.44 ; LED55.2@1907.49,2595.47 ccw(c1935.23,2593.79) LED55.2@1915.58,2574.14 ; LED55.2@1917.47,2594.87 ccw(c1964.85,2591.99) 1931.28,2558.43 ; 2180.73,2570.44 cw(c2200,2551.18) LED54.2@2200,2578.43 ; LED54.2@2182.53,2594.87 cw(c2135.15,2591.99) 2168.72,2558.43 ; LED54.2@2184.42,2574.14 ccw(c2164.77,2593.79) LED54.2@2192.51,2595.47 ; LED54.2@2200,2618.43 ccw(c2200,2645.67) 2219.27,2626.41 ; LED54.2@2207.49,2601.38 cw(c2235.23,2603.06) LED54.2@2215.58,2622.71 ; LED54.2@2217.47,2601.98 cw(c2264.85,2604.86) 2231.28,2638.42 ; 2468.72,2638.42 cw(c2435.15,2604.86) LED53.2@2482.53,2601.98 ; 2480.73,2626.41 ccw(c2500,2645.67) LED53.2@2500,2618.43 ; LED53.2@2484.42,2622.71 cw(c2464.77,2603.06) LED53.2@2492.51,2601.38 ; LED53.2@2500,2578.43 cw(c2500,2551.18) 2519.27,2570.44 ; LED53.2@2507.49,2595.47 ccw(c2535.23,2593.79) LED53.2@2515.58,2574.14 ; LED53.2@2517.47,2594.87 ccw(c2564.85,2591.99) 2531.28,2558.43 ; 2780.73,2570.44 cw(c2800,2551.18) LED52.2@2800,2578.43 ; LED52.2@2782.53,2594.87 cw(c2735.15,2591.99) 2768.72,2558.43 ; LED52.2@2784.42,2574.14 ccw(c2764.77,2593.79) LED52.2@2792.51,2595.47 ; LED52.2@2800,2618.43 ccw(c2800,2645.67) 2819.27,2626.41 ; LED52.2@2807.49,2601.38 cw(c2835.23,2603.06) LED52.2@2815.58,2622.71 ; LED52.2@2817.47,2601.98 cw(c2864.85,2604.86) 2831.28,2638.42 ; 3068.72,2638.42 cw(c3035.15,2604.86) LED51.2@3082.53,2601.98 ; 3080.73,2626.41 ccw(c3100,2645.67) LED51.2@3100,2618.43 ; LED51.2@3084.42,2622.71 cw(c3064.77,2603.06) LED51.2@3092.51,2601.38 ; LED51.2@3100,2578.43 cw(c3100,2551.18) 3119.27,2570.44 ; LED51.2@3107.49,2595.47 ccw(c3135.23,2593.79) LED51.2@3115.58,2574.14 ; LED51.2@3117.47,2594.87 ccw(c3164.85,2591.99) 3131.28,2558.43 ; 3380.73,2570.44 cw(c3400,2551.18) LED50.2@3400,2578.43 ; LED50.2@3382.53,2594.87 cw(c3335.15,2591.99) 3368.72,2558.43 ; LED50.2@3384.42,2574.14 ccw(c3364.77,2593.79) LED50.2@3392.51,2595.47 ; LED50.2@3400,2618.43 ccw(c3400,2645.67) 3419.27,2626.41 ; LED50.2@3407.49,2601.38 cw(c3435.23,2603.06) LED50.2@3415.58,2622.71 ; LED50.2@3417.47,2601.98 cw(c3464.85,2604.86) 3431.28,2638.42 ; 3668.72,2638.42 cw(c3635.15,2604.86) LED49.2@3682.53,2601.98 ; 3680.73,2626.41 ccw(c3700,2645.67) LED49.2@3700,2618.43 ; LED49.2@3684.42,2622.71 cw(c3664.77,2603.06) LED49.2@3692.51,2601.38 ; LED49.2@3700,2598.43 3700,2607.14 3668.71,2638.43 3431.29,2638.43 3400,2607.14 LED50.2@3400,2598.43 3400,2589.71 3368.71,2558.43 ; 731.29,2558.43 968.71,2558.43 ; 968.71,2558.43 1000,2589.71 LED58.2@1000,2598.43 1000,2607.14 1031.29,2638.43 1268.71,2638.43 1300,2607.14 LED57.2@1300,2598.43 1300,2589.71 1331.29,2558.43 ; 1331.29,2558.43 1568.71,2558.43 ; 1568.71,2558.43 1600,2589.71 LED56.2@1600,2598.43 1600,2607.14 1631.29,2638.43 1868.71,2638.43 1900,2607.14 LED55.2@1900,2598.43 1900,2589.71 1931.29,2558.43 ; 1931.29,2558.43 2168.71,2558.43 ; 2168.71,2558.43 2200,2589.71 LED54.2@2200,2598.43 2200,2607.14 2231.29,2638.43 2468.71,2638.43 2500,2607.14 LED53.2@2500,2598.43 2500,2589.71 2531.29,2558.43 ; 2531.29,2558.43 2768.71,2558.43 ; 2768.71,2558.43 2800,2589.71 LED52.2@2800,2598.43 2800,2607.14 2831.29,2638.43 3068.71,2638.43 3100,2607.14 LED51.2@3100,2598.43 3100,2589.71 3131.29,2558.43 ; 3131.29,2558.43 3368.71,2558.43
R6: LED61.2 LED62.2 LED63.2 LED64.2 LED65.2 LED66.2 LED67.2 LED68.2 LED69.2 LED70.2 LED71.2 LED72.2 R28.2 | length 6201.5
  Top Layer w10: v1(400,2190) 460,2200 R28.2@550,2200 ; v1@407.27,2200.17 ccw(c424.81,2224.73) 429.77,2194.96 ccw(c434.73,2165.19) v1@410.17,2182.73 ; R28.2@534.09,2184.09 ccw(c495.68,2145.68) 495.68,2200 ccw(c495.68,2254.32) R28.2@534.09,2215.91 ; R28.2@541.16,2191.16 ccw(c519.82,2169.82) 519.82,2200 ccw(c519.82,2230.18) R28.2@541.16,2208.84
  Bottom Layer w10: LED72.2@387.63,2283.55 cw(c357.75,2253.68) 400,2253.68 cw(c442.25,2253.68) LED72.2@412.37,2283.55 ; v1@391.16,2198.84 ccw(c369.82,2220.18) 400,2220.18 ccw(c430.18,2220.18) v1@408.84,2198.84 ; v1(400,2190) LED72.2@400,2298.43 400,2307.14 431.29,2338.43 668.71,2338.43 700,2307.14 LED71.2@700,2298.43 700,2289.71 731.29,2258.43 ; LED72.2@400,2318.43 ccw(c400,2345.67) 419.27,2326.41 ; LED72.2@407.49,2301.38 cw(c435.23,2303.06) LED72.2@415.58,2322.71 ; LED72.2@417.47,2301.98 cw(c464.85,2304.86) 431.28,2338.42 ; 668.72,2338.42 cw(c635.15,2304.86) LED71.2@682.53,2301.98 ; 680.73,2326.41 ccw(c700,2345.67) LED71.2@700,2318.43 ; LED71.2@684.42,2322.71 cw(c664.77,2303.06) LED71.2@692.51,2301.38 ; LED71.2@700,2278.43 cw(c700,2251.18) 719.27,2270.44 ; LED71.2@707.49,2295.47 ccw(c735.23,2293.79) LED71.2@715.58,2274.14 ; LED71.2@717.47,2294.87 ccw(c764.85,2291.99) 731.28,2258.43 ; 980.73,2270.44 cw(c1000,2251.18) LED70.2@1000,2278.43 ; LED70.2@982.53,2294.87 cw(c935.15,2291.99) 968.72,2258.43 ; LED70.2@984.42,2274.14 ccw(c964.77,2293.79) LED70.2@992.51,2295.47 ; LED70.2@1000,2318.43 ccw(c1000,2345.67) 1019.27,2326.41 ; LED70.2@1007.49,2301.38 cw(c1035.23,2303.06) LED70.2@1015.58,2322.71 ; LED70.2@1017.47,2301.98 cw(c1064.85,2304.86) 1031.28,2338.42 ; 1268.72,2338.42 cw(c1235.15,2304.86) LED69.2@1282.53,2301.98 ; 1280.73,2326.41 ccw(c1300,2345.67) LED69.2@1300,2318.43 ; LED69.2@1284.42,2322.71 cw(c1264.77,2303.06) LED69.2@1292.51,2301.38 ; LED69.2@1300,2278.43 cw(c1300,2251.18) 1319.27,2270.44 ; LED69.2@1307.49,2295.47 ccw(c1335.23,2293.79) LED69.2@1315.58,2274.14 ; LED69.2@1317.47,2294.87 ccw(c1364.85,2291.99) 1331.28,2258.43 ; 1580.73,2270.44 cw(c1600,2251.18) LED68.2@1600,2278.43 ; LED68.2@1582.53,2294.87 cw(c1535.15,2291.99) 1568.72,2258.43 ; LED68.2@1584.42,2274.14 ccw(c1564.77,2293.79) LED68.2@1592.51,2295.47 ; LED68.2@1600,2318.43 ccw(c1600,2345.67) 1619.27,2326.41 ; LED68.2@1607.49,2301.38 cw(c1635.23,2303.06) LED68.2@1615.58,2322.71 ; LED68.2@1617.47,2301.98 cw(c1664.85,2304.86) 1631.28,2338.42 ; 1868.72,2338.42 cw(c1835.15,2304.86) LED67.2@1882.53,2301.98 ; 1880.73,2326.41 ccw(c1900,2345.67) LED67.2@1900,2318.43 ; LED67.2@1884.42,2322.71 cw(c1864.77,2303.06) LED67.2@1892.51,2301.38 ; LED67.2@1900,2278.43 cw(c1900,2251.18) 1919.27,2270.44 ; LED67.2@1907.49,2295.47 ccw(c1935.23,2293.79) LED67.2@1915.58,2274.14 ; LED67.2@1917.47,2294.87 ccw(c1964.85,2291.99) 1931.28,2258.43 ; 2180.73,2270.44 cw(c2200,2251.18) LED66.2@2200,2278.43 ; LED66.2@2182.53,2294.87 cw(c2135.15,2291.99) 2168.72,2258.43 ; LED66.2@2184.42,2274.14 ccw(c2164.77,2293.79) LED66.2@2192.51,2295.47 ; LED66.2@2200,2318.43 ccw(c2200,2345.67) 2219.27,2326.41 ; LED66.2@2207.49,2301.38 cw(c2235.23,2303.06) LED66.2@2215.58,2322.71 ; LED66.2@2217.47,2301.98 cw(c2264.85,2304.86) 2231.28,2338.42 ; 2468.72,2338.42 cw(c2435.15,2304.86) LED65.2@2482.53,2301.98 ; 2480.73,2326.41 ccw(c2500,2345.67) LED65.2@2500,2318.43 ; LED65.2@2484.42,2322.71 cw(c2464.77,2303.06) LED65.2@2492.51,2301.38 ; LED65.2@2500,2278.43 cw(c2500,2251.18) 2519.27,2270.44 ; LED65.2@2507.49,2295.47 ccw(c2535.23,2293.79) LED65.2@2515.58,2274.14 ; LED65.2@2517.47,2294.87 ccw(c2564.85,2291.99) 2531.28,2258.43 ; 2780.73,2270.44 cw(c2800,2251.18) LED64.2@2800,2278.43 ; LED64.2@2782.53,2294.87 cw(c2735.15,2291.99) 2768.72,2258.43 ; LED64.2@2784.42,2274.14 ccw(c2764.77,2293.79) LED64.2@2792.51,2295.47 ; LED64.2@2800,2318.43 ccw(c2800,2345.67) 2819.27,2326.41 ; LED64.2@2807.49,2301.38 cw(c2835.23,2303.06) LED64.2@2815.58,2322.71 ; LED64.2@2817.47,2301.98 cw(c2864.85,2304.86) 2831.28,2338.42 ; 3068.72,2338.42 cw(c3035.15,2304.86) LED63.2@3082.53,2301.98 ; 3080.73,2326.41 ccw(c3100,2345.67) LED63.2@3100,2318.43 ; LED63.2@3084.42,2322.71 cw(c3064.77,2303.06) LED63.2@3092.51,2301.38 ; LED63.2@3100,2278.43 cw(c3100,2251.18) 3119.27,2270.44 ; LED63.2@3107.49,2295.47 ccw(c3135.23,2293.79) LED63.2@3115.58,2274.14 ; LED63.2@3117.47,2294.87 ccw(c3164.85,2291.99) 3131.28,2258.43 ; 3380.73,2270.44 cw(c3400,2251.18) LED62.2@3400,2278.43 ; LED62.2@3382.53,2294.87 cw(c3335.15,2291.99) 3368.72,2258.43 ; LED62.2@3384.42,2274.14 ccw(c3364.77,2293.79) LED62.2@3392.51,2295.47 ; LED62.2@3400,2318.43 ccw(c3400,2345.67) 3419.27,2326.41 ; LED62.2@3407.49,2301.38 cw(c3435.23,2303.06) LED62.2@3415.58,2322.71 ; LED62.2@3417.47,2301.98 cw(c3464.85,2304.86) 3431.28,2338.42 ; 3668.72,2338.42 cw(c3635.15,2304.86) LED61.2@3682.53,2301.98 ; 3680.73,2326.41 ccw(c3700,2345.67) LED61.2@3700,2318.43 ; LED61.2@3684.42,2322.71 cw(c3664.77,2303.06) LED61.2@3692.51,2301.38 ; LED61.2@3700,2298.43 3700,2307.14 3668.71,2338.43 3431.29,2338.43 3400,2307.14 LED62.2@3400,2298.43 3400,2289.71 3368.71,2258.43 ; 731.29,2258.43 968.71,2258.43 ; 968.71,2258.43 1000,2289.71 LED70.2@1000,2298.43 1000,2307.14 1031.29,2338.43 1268.71,2338.43 1300,2307.14 LED69.2@1300,2298.43 1300,2289.71 1331.29,2258.43 ; 1331.29,2258.43 1568.71,2258.43 ; 1568.71,2258.43 1600,2289.71 LED68.2@1600,2298.43 1600,2307.14 1631.29,2338.43 1868.71,2338.43 1900,2307.14 LED67.2@1900,2298.43 1900,2289.71 1931.29,2258.43 ; 1931.29,2258.43 2168.71,2258.43 ; 2168.71,2258.43 2200,2289.71 LED66.2@2200,2298.43 2200,2307.14 2231.29,2338.43 2468.71,2338.43 2500,2307.14 LED65.2@2500,2298.43 2500,2289.71 2531.29,2258.43 ; 2531.29,2258.43 2768.71,2258.43 ; 2768.71,2258.43 2800,2289.71 LED64.2@2800,2298.43 2800,2307.14 2831.29,2338.43 3068.71,2338.43 3100,2307.14 LED63.2@3100,2298.43 3100,2289.71 3131.29,2258.43 ; 3131.29,2258.43 3368.71,2258.43